# Altium PCB Carrier_Board_Template.PcbDoc
Units mil, origin at the board's own origin, x right, y up, seen from the top; angles counter-clockwise.
Board outline 1377.95 x 1181.1 mil, 2 copper layers (Top Layer, Bottom Layer); 1 components, 32 nets, 58 pads, 0 vias.
Unrouted connection lines stored in the file: 15.
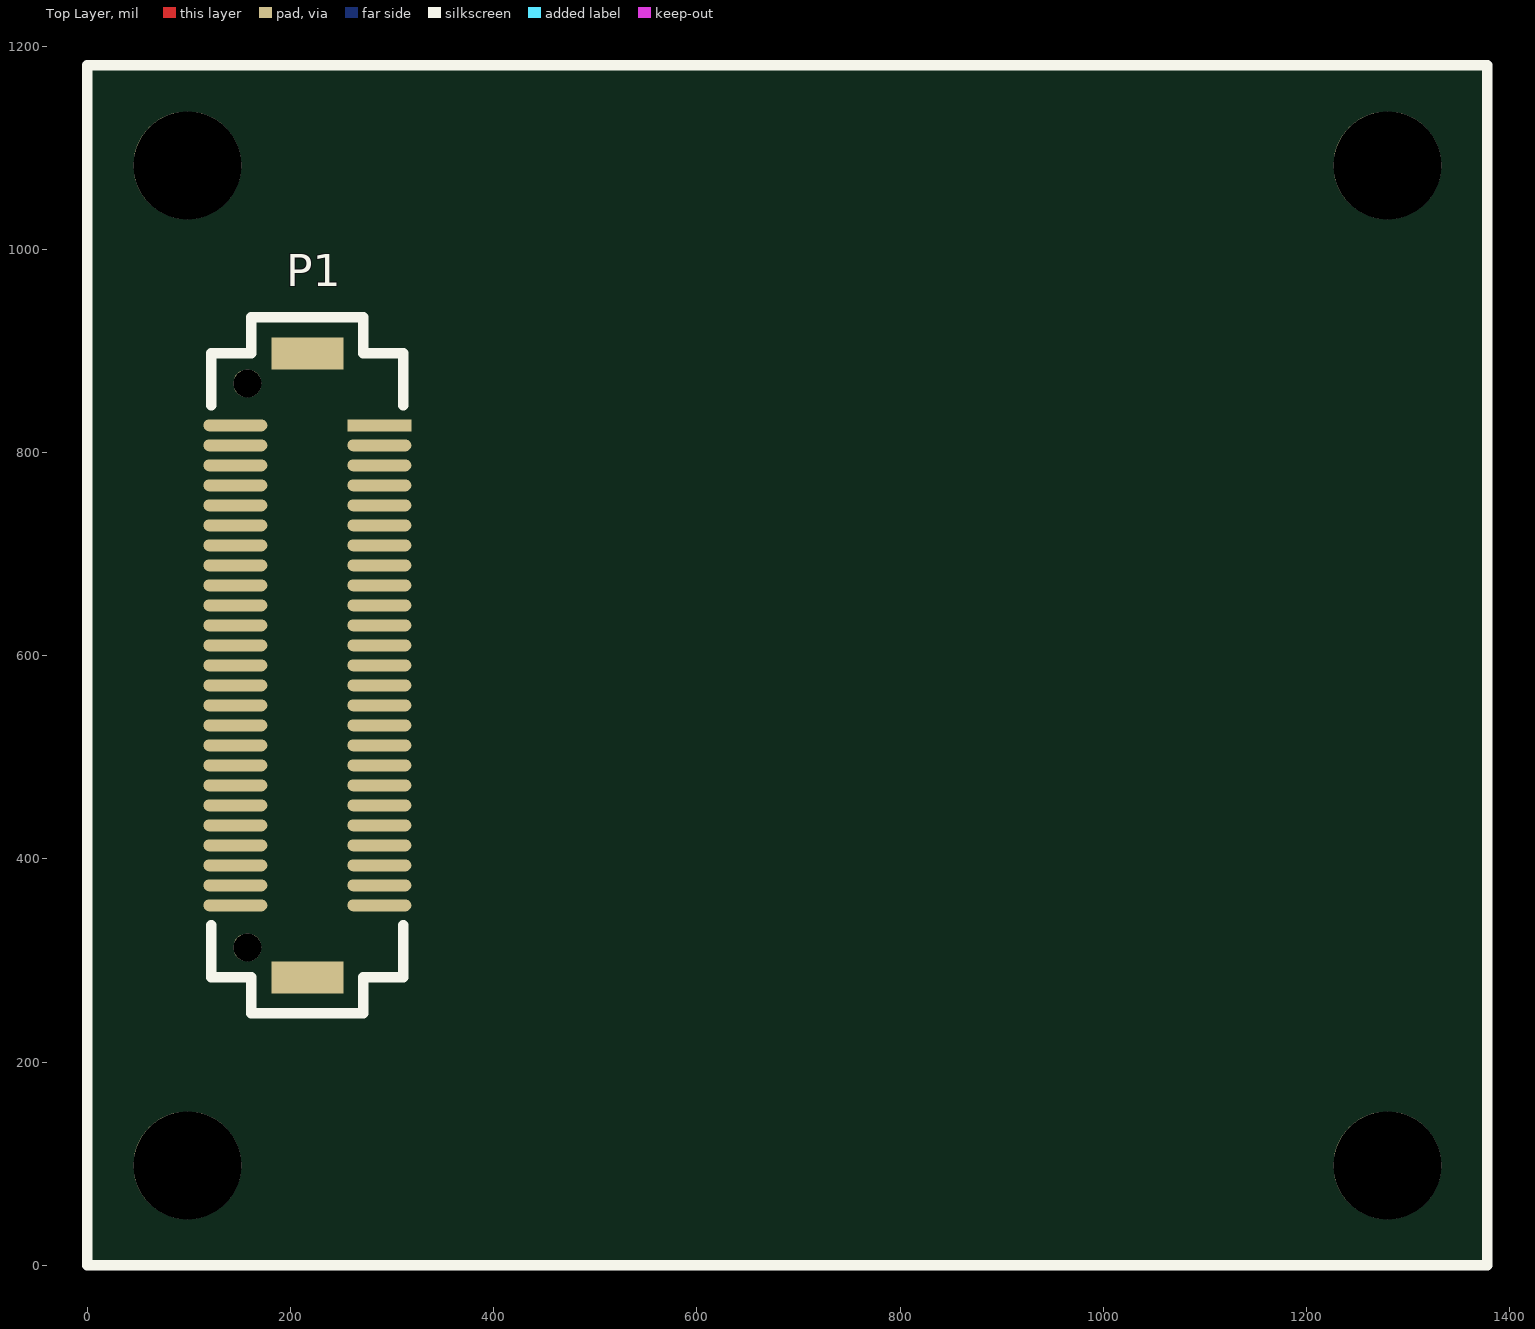
[diagram p0: Top Layer view]
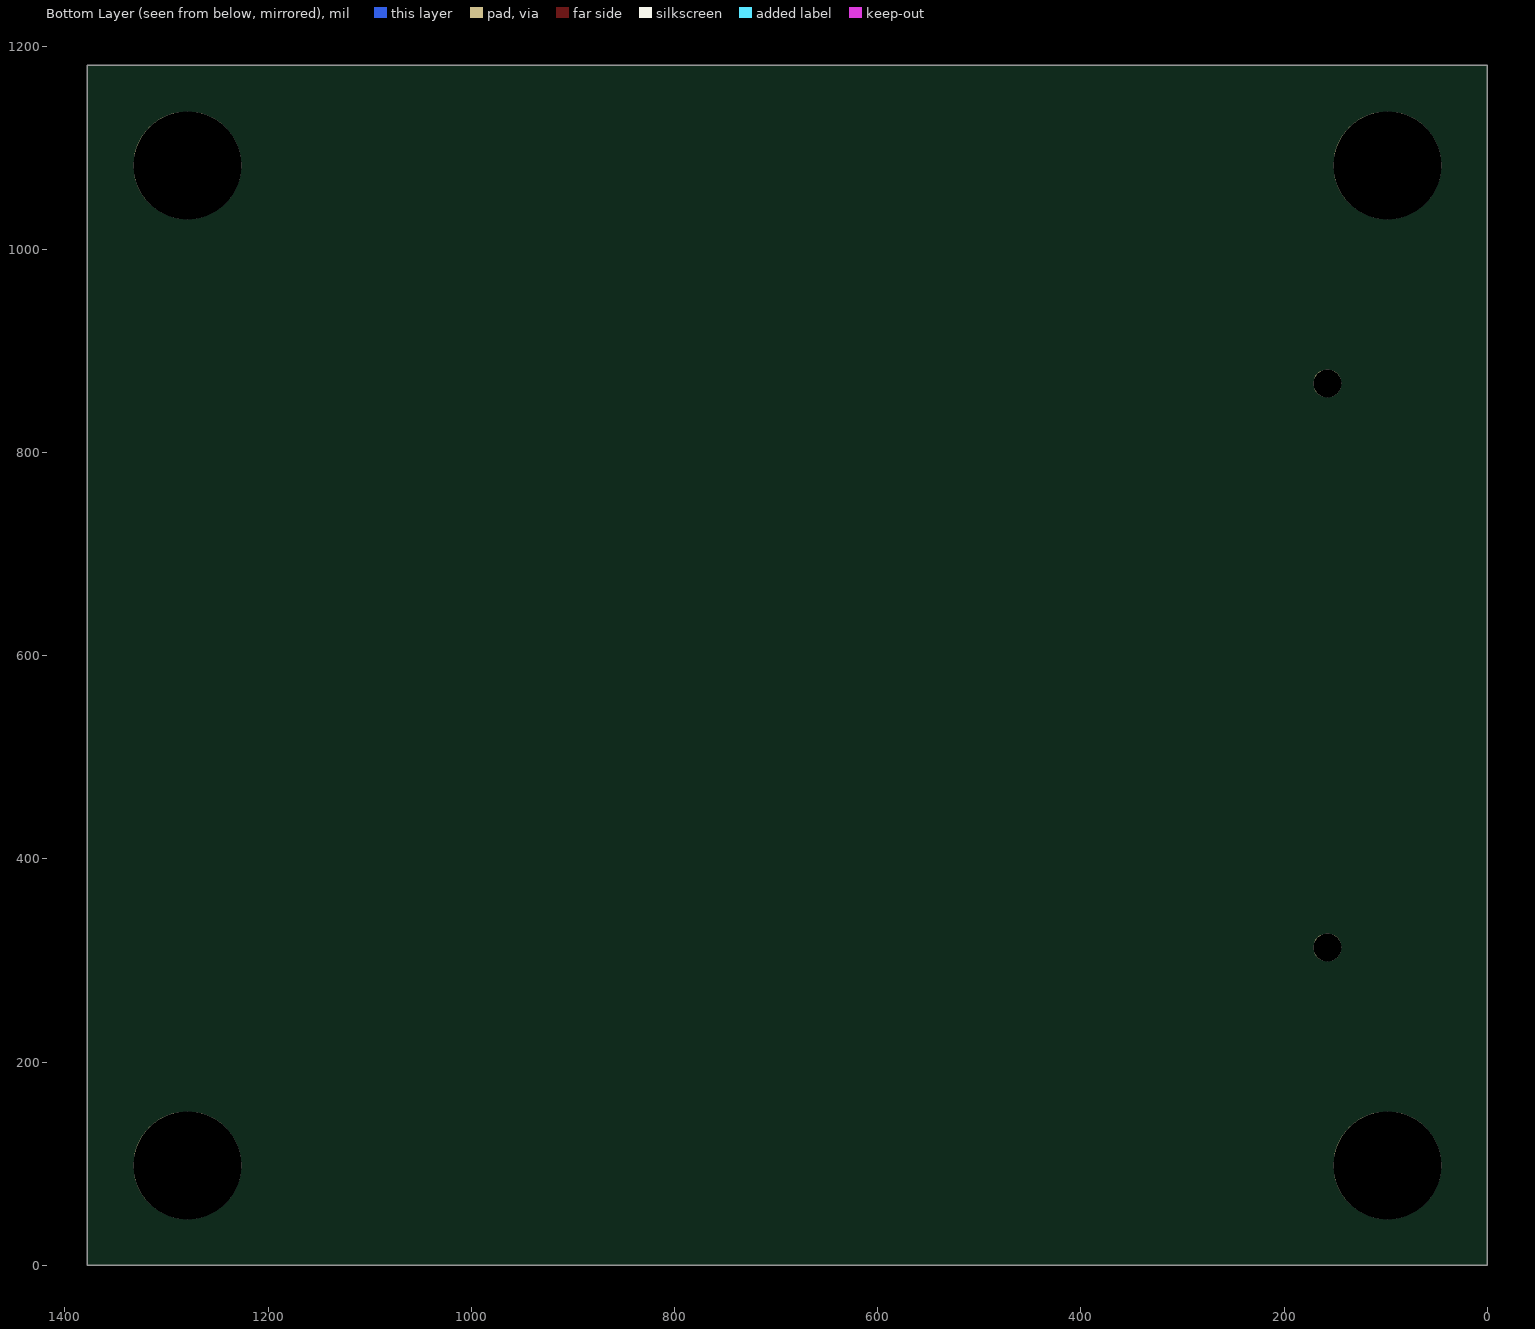
[diagram p1: Bottom Layer view, seen from below]

## Layer stack, top to bottom
Top Solder: solder mask 0.4, Solder Resist, Dk 3.5
Top Layer: signal copper 1.4
Dielectric 1: dielectric 12.6, FR-4, Dk 4.8
Bottom Layer: signal copper 1.4
Bottom Solder: solder mask 0.4, Solder Resist, Dk 3.5

## Board outline
0,0 0,1181.1 1377.95,1181.1 1377.95,0

## Design rules (kind name [scope] priority, off if disabled: settings)
BoardOutlineClearance [All] p1: gap=16
Clearance [All] p1: gap=6
HoleSize [All] p1: absolutevalues=TRUE maxlimit=248.03 minlimit=11.81 maxpercent=80.000 minpercent=20.000
MinimumAnnularRing [All] p1: minimumring=6
MinimumSolderMaskSliver [All] p1: minsoldermaskwidth=11.81
PolygonConnect [IsPad] p1: connectstyle=Relief reliefconductorwidth=10 reliefentries=4 polygonreliefangle="90 Angle" airgapwidth=10
PolygonConnect PolygonConnect_NoThermal [Not(IsPad)] p2: connectstyle=Direct reliefconductorwidth=10 reliefentries=4 polygonreliefangle="90 Angle" airgapwidth=10
RoutingVias [All] p1: holewidth=11.81 width=23.62 viastyle="Through Hole" minholewidth=11.81 minwidth=23.62 maxholewidth=28 maxwidth=50
SilkToSolderMaskClearance [IsPad] p1: minsilkscreentomaskgap=7 clearancetoexposedcopper=TRUE
SolderMaskExpansion [All] p1: expansion=4
Width [All] p1: maxlimit=10 minlimit=6 preferedwidth=10
27 further rules are at their usual default settings.

## Components (designator, comment, footprint, x,y, rotation, side; value= is the part's Value field where it differs from the comment)
P1 "CONN 50POS Bergstak Plug 0.02\"" "CONN, BERGSTAK 50 POS PLUG" 216.54,590.55 r0 top locked

## Footprints (in the part's own frame and the unit in brackets; to place one, negate y for a bottom-side part, rotate by r counter-clockwise, add the part's x,y. Pads: shape width x height; smd on the part's side, far side on the other; paste and mask are expansions set on the pad)
"CONN, BERGSTAK 50 POS PLUG" [mm] "Bergstak 50 Position Plug"
  rect 1.6x0.3 smd: 1(1.8,6)
  oval 1.6x0.3 smd: 2(1.8,5.5) 3(1.8,5) 4(1.8,4.5) 5(1.8,4) 6(1.8,3.5) 7(1.8,3) 8(1.8,2.5) 9(1.8,2) 10(1.8,1.5) 11(1.8,1) 12(1.8,0.5) 13(1.8,0) 14(1.8,-0.5) 15(1.8,-1) 16(1.8,-1.5) 17(1.8,-2) 18(1.8,-2.5) 19(1.8,-3) 20(1.8,-3.5) 21(1.8,-4) 22(1.8,-4.5) 23(1.8,-5) 24(1.8,-5.5) 25(1.8,-6) 26(-1.8,-6) 27(-1.8,-5.5) 28(-1.8,-5) 29(-1.8,-4.5) 30(-1.8,-4) 31(-1.8,-3.5) 32(-1.8,-3) 33(-1.8,-2.5) 34(-1.8,-2) 35(-1.8,-1.5) 36(-1.8,-1) 37(-1.8,-0.5) 38(-1.8,0) 39(-1.8,0.5) 40(-1.8,1) 41(-1.8,1.5) 42(-1.8,2) 43(-1.8,2.5) 44(-1.8,3) 45(-1.8,3.5) 46(-1.8,4) 47(-1.8,4.5) 48(-1.8,5) 49(-1.8,5.5) 50(-1.8,6)
  round 0.7 hole 0.7: ""(-1.5,-7.05) ""(-1.5,7.05)
  rect 1.8x0.8 smd: ""(0,-7.8) ""(0,7.8)
  silkscreen extent -2.4,-8.7 2.4,8.7, body extent -2.3,-7.75 2.3,7.75, height 4.2

## Part data
P1: "50 Position Connector Plug, Outer Shroud Contacts Surface Mount Gold"

## Free pads (board coordinates)
  round 106.3 hole 106.3: ""(98.43,98.43) ""(98.43,1082.68) ""(1279.53,98.43) ""(1279.53,1082.68)

## Nets (pads, with @x,y where several pads share a name; then routed paths per layer and width w, separated by ;. In a path a pad name is that pad's centre, name@x,y a point inside that pad or via, vN(x,y) a via of type N, cw(c..) or ccw(c..) an arc to the next point about the centre after c; other vN are vias at no path point)
3V3: P1.40 P1.41 P1.42 P1.43 P1.44 P1.45
+12V: P1.47 P1.48 P1.49 P1.50
GND: P1.1 P1.2 P1.3 P1.4 P1.26 P1.27 P1.28 P1.29
PA0: P1.25
PA1: P1.24
PA2/USART2_TX: P1.23
PA3/USART2_RX: P1.22
PA4/SPI1_NSS: P1.21
PA5/SPI1_SCK: P1.20
PA6/SPI1_MISO: P1.19
PA7/SPI1_MOSI: P1.18
PA8: P1.7
PA9: P1.6
PA10: P1.5
PA15: P1.39
PB0: P1.17
PB1: P1.16
PB2: P1.15
PB3: P1.38
PB4: P1.37
PB5: P1.36
PB6/USART1_TX: P1.34
PB7/USART1_RX: P1.33
PB8/I2C1_SCL: P1.32
PB9/I2C1_SDA: P1.31
PB10/USART3_TX/I2C2_SCL: P1.14
PB11/USART3_RX/I2C2_SDA: P1.13
PB12/SPI2_NSS: P1.11
PB13/SPI2_SCK: P1.10
PB14/SPI2_MISO: P1.9
PB15/SPI2_MOSI: P1.8
PC13: P1.30
pads on no net: P1. P1.12 P1.35 P1.46

## Silkscreen, mask and mechanical layers (free items; w line width, h text height)
Top Overlay:
  the board outline again, w10